# Altium PCB ESP32_DRIVER_BOARD.PcbDoc
Units mm, origin at the board's own origin, x right, y up, seen from the top; angles counter-clockwise.
Board outline 88.25 x 66.25 mm, 2 copper layers (Top Layer, Bottom Layer); 18 components, 41 nets, 173 pads, 36 vias.
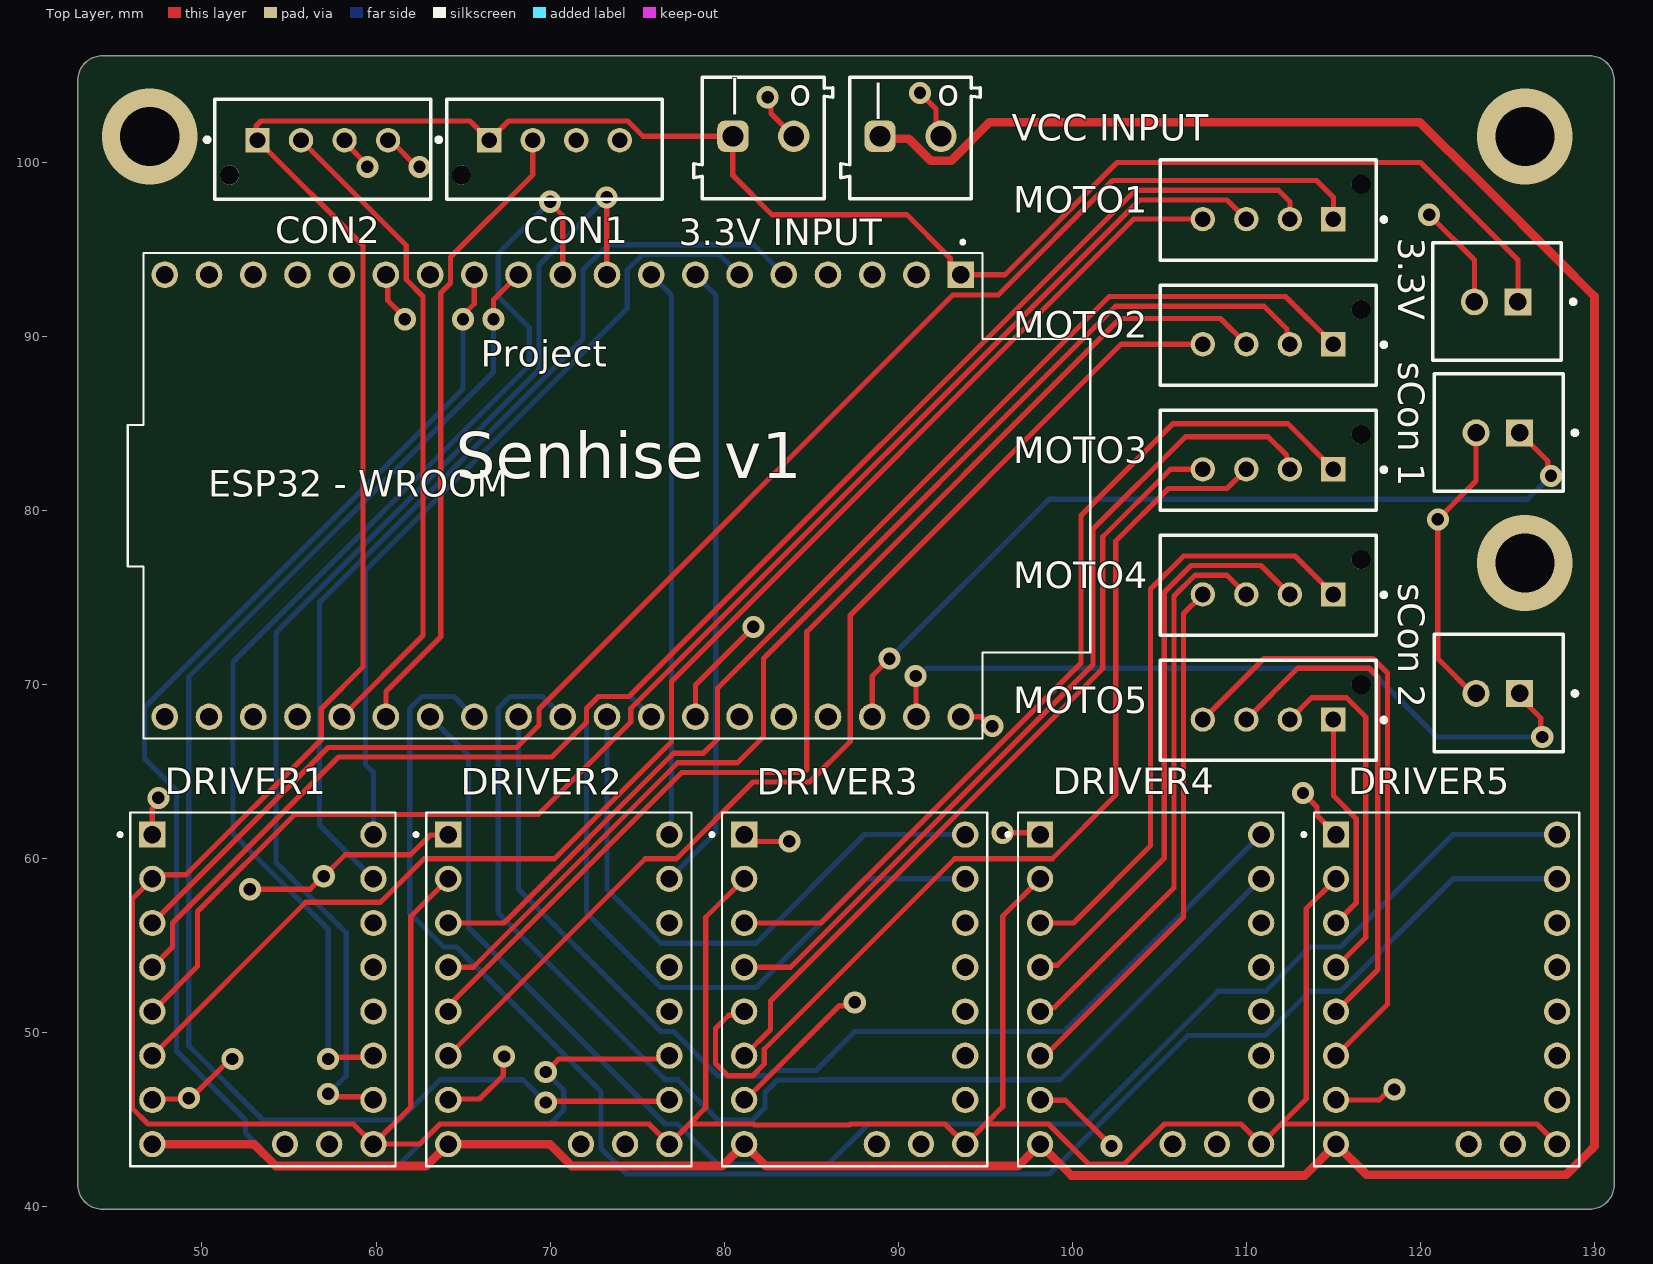
[diagram p0: Top Layer view]
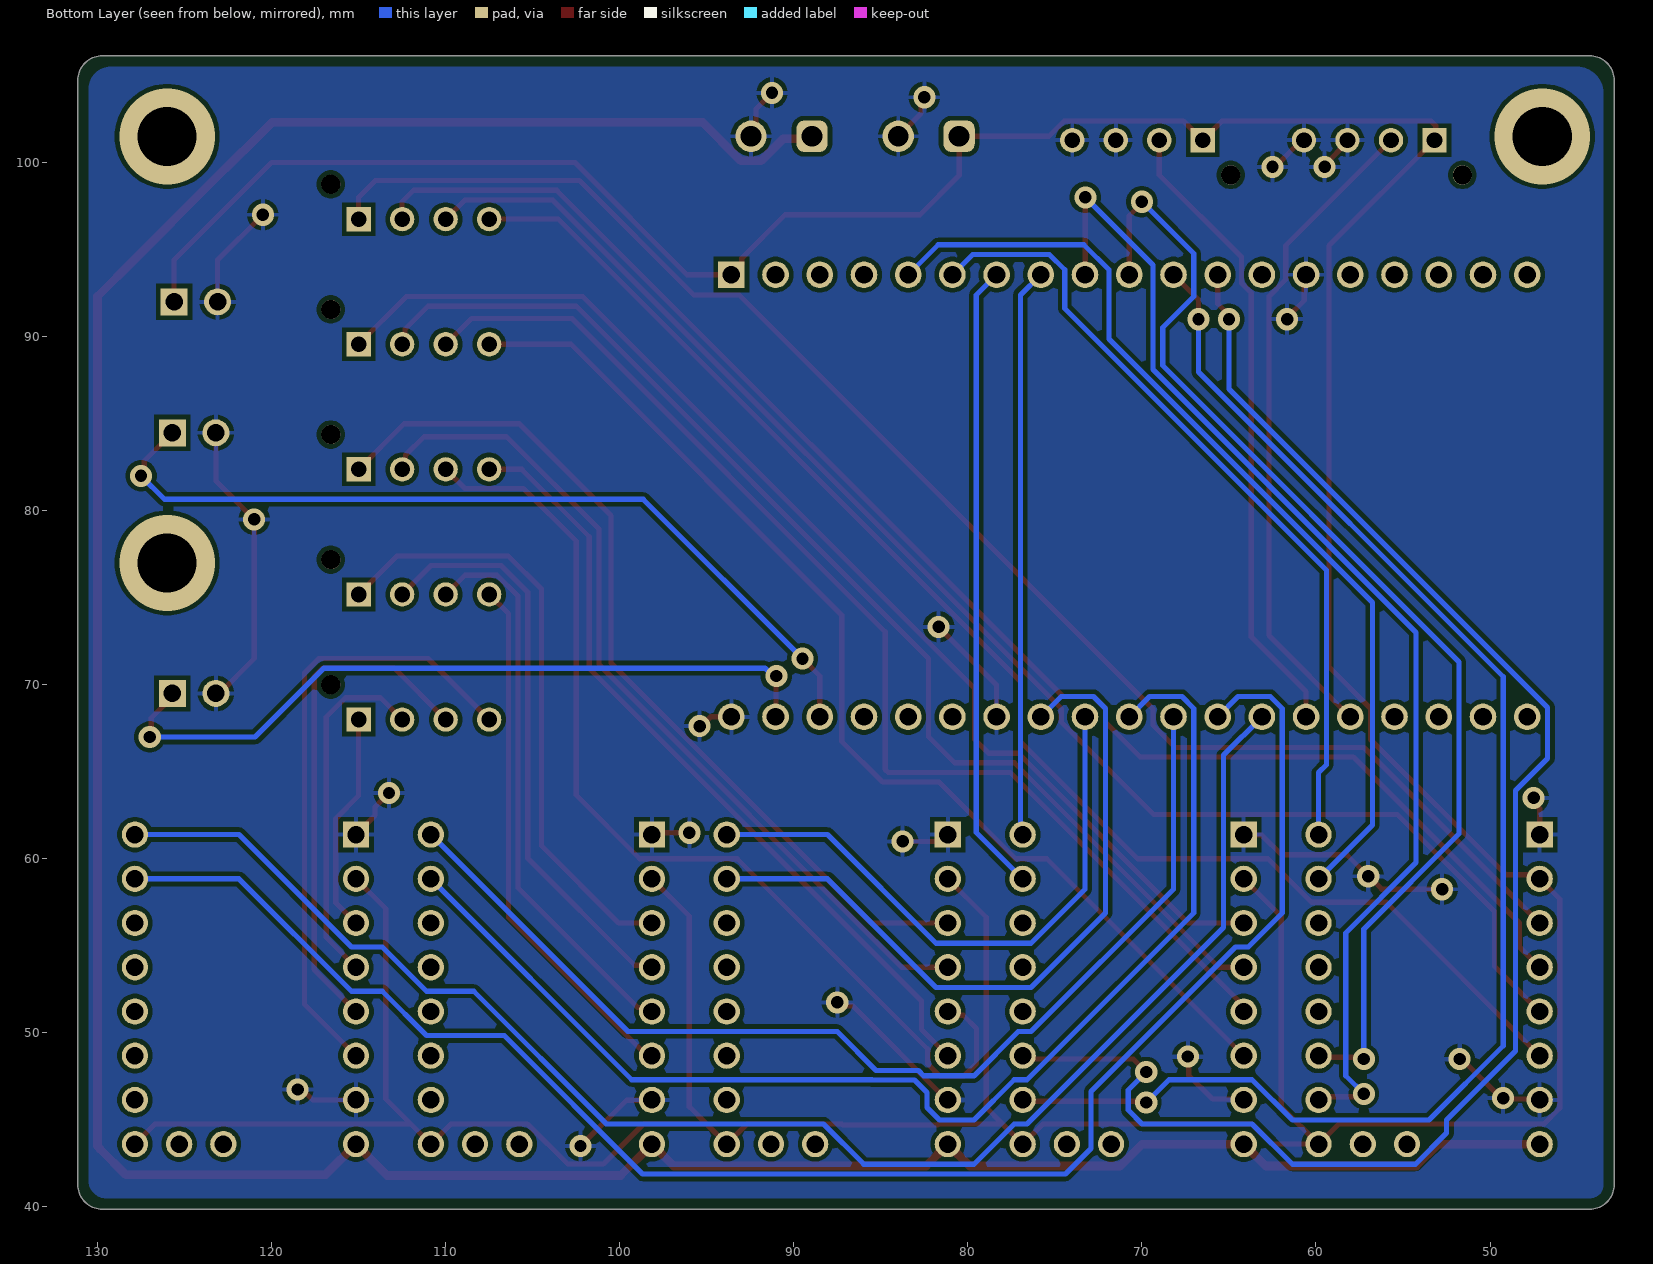
[diagram p1: Bottom Layer view, seen from below]

## Layer stack, top to bottom
Top Solder: solder mask 0.0102, Solder Resist, Dk 3.5
Top Layer: signal copper 0.0356
Dielectric 1: dielectric 0.32, FR-4, Dk 4.8
Bottom Layer: signal copper 0.0356
Bottom Solder: solder mask 0.0102, Solder Resist, Dk 3.5

## Board outline
42.873,41.27 42.873,104.73 cw(c44.27,104.73) 44.27,106.127 129.73,106.127 cw(c129.73,104.73) 131.127,104.73 131.127,41.27 cw(c129.73,41.27) 129.73,39.873 44.27,39.873 cw(c44.27,41.27)

## Design rules (kind name [scope] priority, off if disabled: settings)
Clearance [All] p1: gap=0.254 ignorepadtopadclearanceinfootprint=FALSE
PolygonConnect [All] p1: connectstyle=Relief reliefconductorwidth=0.254 reliefentries=4 polygonreliefangle="90 Angle" airgapwidth=0.254
RoutingVias [All] p1: holewidth=0.711 width=1.27 viastyle="Through Hole" minholewidth=0.711 minwidth=1.27 maxholewidth=0.711 maxwidth=1.27
SolderMaskExpansion [All] p1: expansion=0.102 istentingtop=FALSE
SupplyNets "Schematic Supply Nets_3" [InNet('+3.3V')] p1: voltage=0.000
SupplyNets "Schematic Supply Nets_1" [InNet('VCC')] p2: voltage=0.000
SupplyNets "Schematic Supply Nets" [InNet('GND')] p3: voltage=0.000
Width [All] p1: maxlimit=0.5 minlimit=0.254 preferedwidth=0.3
30 further rules are at their usual default settings.

## Components (designator, comment, footprint, x,y, rotation, side; value= is the part's Value field where it differs from the comment)
3.3V "B2B-XH-2(LF)(SN)" FP-B2B-XH-2_LF_SN-MFG 124.4,92.025 r0 top
"3.3V INPUT" "691103110002" 691103110002 1352.25,1371.41 r0 top
CON1 "B4B-XH-AM (LF)(SN)" FP-B4B-XH-AM_LF_SN-MFG 70.25,100.76 r180 top
CON2 "B4B-XH-AM (LF)(SN)" FP-B4B-XH-AM_LF_SN-MFG 56.942,100.76 r180 top
DRIVER1 "TMC2209_SILENTSTEPSTICK" MODULE_TMC2209_SILENTSTEPSTICK 53.5,52.5 r0 top
DRIVER2 "TMC2209_SILENTSTEPSTICK" MODULE_TMC2209_SILENTSTEPSTICK 70.5,52.5 r0 top
DRIVER3 "TMC2209_SILENTSTEPSTICK" MODULE_TMC2209_SILENTSTEPSTICK 87.5,52.5 r0 top
DRIVER4 "TMC2209_SILENTSTEPSTICK" MODULE_TMC2209_SILENTSTEPSTICK 104.5,52.5 r0 top
DRIVER5 "TMC2209_SILENTSTEPSTICK" MODULE_TMC2209_SILENTSTEPSTICK 121.5,52.5 r0 top
"ESP32 - WROOM" "DEVKIT_V1_ESP32-WROOM-32" MODULE_DEVKIT_V1_ESP32-WROOM-32 70.737,80.856 r270 top
MOTO1 "B4B-XH-AM (LF)(SN)" FP-B4B-XH-AM_LF_SN-MFG 111.25,97.275 r0 top
MOTO2 "B4B-XH-AM (LF)(SN)" FP-B4B-XH-AM_LF_SN-MFG 111.25,90.087 r0 top
MOTO3 "B4B-XH-AM (LF)(SN)" FP-B4B-XH-AM_LF_SN-MFG 111.25,82.9 r0 top
MOTO4 "B4B-XH-AM (LF)(SN)" FP-B4B-XH-AM_LF_SN-MFG 111.25,75.713 r0 top
MOTO5 "B4B-XH-AM (LF)(SN)" FP-B4B-XH-AM_LF_SN-MFG 111.25,68.525 r0 top
"sCon 1" "B2B-XH-2(LF)(SN)" FP-B2B-XH-2_LF_SN-MFG 124.5,84.5 r0 top
"sCon 2" "B2B-XH-2(LF)(SN)" FP-B2B-XH-2_LF_SN-MFG 124.5,69.525 r0 top
"VCC INPUT" "691103110002" 691103110002 1360.707,1371.41 r0 top (schematic designator VCC)

## Footprints (in the part's own frame and the unit in brackets; to place one, negate y for a bottom-side part, rotate by r counter-clockwise, add the part's x,y. Pads: shape width x height; smd on the part's side, far side on the other; paste and mask are expansions set on the pad)
691103110002 [mm] "3,50mm - modular - blue - Horizontal wire entry - Pressure clamp - 8,4mm height - 02p"
  rrect50% 1.8x1.8 hole 1.2: 1(-1271.75,-1269.9)
  round 1.8 hole 1.2: 2(-1268.25,-1269.9)
  silkscreen extent -1274,-1273.5 -1266,-1266.5, body extent -1274,-1273.5 -1266,-1266.5, height 8.45
FP-B2B-XH-2_LF_SN-MFG [mm]
  rect 1.55x1.55 hole 1 paste-2539.97 mask+0: 1(1.2,-0.025)
  round 1.55 hole 1 paste-2539.97 mask+0: 2(-1.3,-0.025)
  silkscreen extent -3.7,-3.37 4.5,3.37, body extent -3.8,-3.47 3.8,3.47, height 0.25
FP-B4B-XH-AM_LF_SN-MFG [mm]
  rect 1.4x1.4 hole 0.9 paste-2539.97 mask+0: 1(3.75,-0.525)
  round 1.4 hole 0.9 paste-2539.97 mask+0: 2(1.25,-0.525) 3(-1.25,-0.525) 4(-3.75,-0.525)
  round 1.1 hole 1.1 unplated paste-2539.97 mask+0: ""(5.35,1.475)
  silkscreen extent -6.2,-2.88 6.77,2.88, body extent -6.3,-2.98 6.3,2.98, height 0.25
MODULE_DEVKIT_V1_ESP32-WROOM-32 [mm]
  rect 1.53x1.53 / inner round 1.53 / far side rect 1.53x1.53 hole 1.02: 1(-12.7,22.85)
  round 1.53 hole 1.02: 2(-12.7,20.31) 3(-12.7,17.77) 4(-12.7,15.23) 5(-12.7,12.69) 6(-12.7,10.15) 7(-12.7,7.61) 8(-12.7,5.07) 9(-12.7,2.53) 10(-12.7,-0.01) 11(-12.7,-2.55) 12(-12.7,-5.09) 13(-12.7,-7.63) 14(-12.7,-10.17) 15(-12.7,-12.71) 16(-12.7,-15.25) 17(-12.7,-17.79) 18(-12.7,-20.33) 19(-12.7,-22.87) 20(12.7,-22.87) 21(12.7,-20.33) 22(12.7,-17.79) 23(12.7,-15.25) 24(12.7,-12.71) 25(12.7,-10.17) 26(12.7,-7.63) 27(12.7,-5.09) 28(12.7,-2.55) 29(12.7,-0.01) 30(12.7,2.53) 31(12.7,5.07) 32(12.7,7.61) 33(12.7,10.15) 34(12.7,12.69) 35(12.7,15.23) 36(12.7,17.77) 37(12.7,20.31) 38(12.7,22.85)
  silkscreen extent -14.67,-25 13.95,30.3
MODULE_TMC2209_SILENTSTEPSTICK [mm]
  rect 1.508x1.508 / inner round 1.508 / far side rect 1.508x1.508 hole 1: 1(-6.35,8.89)
  round 1.508 hole 1: 2(-6.35,6.35) 3(-6.35,3.81) 4(-6.35,1.27) 5(-6.35,-1.27) 6(-6.35,-3.81) 7(-6.35,-6.35) 8(-6.35,-8.89) 9(6.35,8.89) 10(6.35,6.35) 11(6.35,3.81) 12(6.35,1.27) 13(6.35,-1.27) 14(6.35,-3.81) 15(6.35,-6.35) 16(6.35,-8.89) 17(1.27,-8.89) 18(3.81,-8.89)
  silkscreen extent -8.3,-10.16 7.62,10.16

## Part data
3.3V "sCon 1" "sCon 2": library part CMP-17439-000499-1, "CONN HEADER VERT 2POS 2.5MM", Current Rating=3A, Flammability Rating="UL94 V-0", Insulation Color=Natural, Max Operating Temperature=85°C, Min Operating Temperature=-25°C, Voltage Rating=250V, Connector Type=Header, Contact Finish - Mating=TIN, Contact Material=Brass, Contact Shape=Square, Contact Type="Male Pin", Fastening Type=Detent, Height=7mm, Housing Material=Nylon, Insulation Material=Nylon, Length=7.4mm, Mount="Through Hole", Number of Poles=2, Number of Positions=2, Number of Rows=1, Packaging=Bulk, Pitch=2.5mm, Series=XH, Shape=Straight, Termination=Press-Fit, Width=5.75mm
"3.3V INPUT" "VCC INPUT": library part CMP-1502-03254-2, Color=Blue, Current=10A, Max Operating Temperature=105°C, Min Operating Temperature=-40°C, Voltage=125V, Contact Material="Brass, Copper, Nickel, Tin, Zinc", Contact Plating=Tin, Current Rating=10A, Height=8.5mm, Housing Material=Nylon, Lead Pitch=3.5mm, Length=7mm, Mount="Through Hole", NexarPartId=18818286, Number of Contacts=2, Number of Levels=1, Number of Pins=2, Number of Positions Per Level=2, Number of Rows=1, Packaging=Box, Pitch=3.5052mm, Plating=Steel, REACH SVHC=Unknown, RoHS=Compliant, Stripping Length=-6mm, Termination=Screw, Voltage Rating=125V, Width=8mm, Wire Gauge (Max)=26AWG, Wire Gauge (Min)=16AWG, Wire/Cable Gauge=26AWG
CON1 CON2 MOTO1 MOTO2 MOTO3 MOTO4 MOTO5: library part CMP-17439-000117-1, "CONN HEADER VERT 4POS 2.5MM", Color=Green, Contact Resistance=20mR, Flammability Rating="UL94 V-0", Housing Color=White, Insulation Color=Natural, Max Current Rating=3A, Max Operating Temperature=85°C, Max Voltage Rating (AC)=250V, Min Operating Temperature=-25°C, Connector Type=Header, Contact Finish - Mating=TIN, Contact Material=Brass, Contact Plating=Copper, Contact Shape=Square, Contact Type="Male Pin", Depth=5.75mm, Fastening Type=Detent, Gender=Male, Housing Material=Polyamide, Insulation Material=Nylon, Lead Free="Lead Free", Length=12.4mm, Mated Stacking Heights=9.8mm, Mount="Through Hole", Number of Pins=4, Number of Positions=4, Number of Rows=1, Orientation=Straight, Packaging=Bulk, Pitch=2.5mm, Series=XH, Termination=Solder, Voltage Rating=250V
DRIVER1 DRIVER2 DRIVER3 DRIVER4 DRIVER5: "TMC2209 Motor Controller/Driver Power Management Evaluation Board", Package=None, Availability="In Stock", Check_prices=https://www.snapeda.com/parts/TMC2209%20SILENTSTEPSTICK/Trinamic+Motion+Control+GmbH/view-part/?ref=eda, MF="Trinamic Motion Control GmbH", MP="TMC2209 SILENTSTEPSTICK", Price=None, Purchase-URL="https://pricing.snapeda.com/search/part/TMC2209 SILENTSTEPSTICK/?ref=eda", SnapEDA_Link=https://www.snapeda.com/parts/TMC2209%20SILENTSTEPSTICK/Trinamic+Motion+Control+GmbH/view-part/?ref=snap
"ESP32 - WROOM": "WROOM-32 Development Board ESP32 ESP-32S WiFi Bluetooth Dev Module", Package=Package, Check_prices=https://www.snapeda.com/parts/DEVKIT%20V1%20ESP32-WROOM-32/Espressif+Systems/view-part/?ref=eda, MF="Espressif Systems", MP="DEVKIT V1 ESP32-WROOM-32", SnapEDA_Link=https://www.snapeda.com/parts/DEVKIT%20V1%20ESP32-WROOM-32/Espressif+Systems/view-part/?ref=snap

## Via types
v1: diameter 1.27, hole 0.711, Top Layer to Bottom Layer, 33 vias
v2: diameter 5.5, hole 3.4, Top Layer to Bottom Layer, 3 vias

## Nets (pads, with @x,y where several pads share a name; then routed paths per layer and width w, separated by ;. In a path a pad name is that pad's centre, name@x,y a point inside that pad or via, vN(x,y) a via of type N, cw(c..) or ccw(c..) an arc to the next point about the centre after c; other vN are vias at no path point)
+3.3V: 3.3V.1 "3.3V INPUT.1" "ESP32 - WROOM.1" CON1.1 CON2.1 DRIVER1.2 DRIVER1.16 DRIVER2.2 DRIVER2.16 DRIVER3.2 DRIVER3.16 DRIVER4.2 DRIVER4.16 DRIVER5.2 DRIVER5.16 | length 303.4
  Top Layer w0.3: DRIVER2.2 62,56.7 62,45.76 DRIVER1.16 ; DRIVER3.2 78.946,56.646 78.946,45.706 78.008,44.768 ; DRIVER4.2 96,56.7 96,45.76 95.008,44.768 ; DRIVER5.2 113.438,57.138 113.438,46.198 112.008,44.768 ; 3.3V.1 125.6,94.4 120,100 102.573,100 96.129,93.556 93.587,93.556 93.587,93.913 93.241,93.913 92.983,94.171 92.983,94.517 90.5,97 82.75,97 80.5,99.25 80.5,101.51 75.336,101.51 74.457,102.389 67.604,102.389 CON1.1 65.396,102.389 53.389,102.389 53.124,102.124 53.124,101.352 CON2.1 59.25,95.226 59.25,71.031 56.858,68.64 56.858,66.858 49.081,59.081 47.381,59.081 DRIVER1.2 45.992,57.692 45.992,45.67 46.894,44.768 58.692,44.768 DRIVER1.16 ; DRIVER5.16 126.692,44.768 112.008,44.768 ; DRIVER1.16 62.512,43.61 63.67,44.768 75.692,44.768 DRIVER2.16 78.008,44.768 ; 78.008,44.768 81.691,44.768 81.748,44.711 87.191,44.711 87.248,44.768 92.692,44.768 DRIVER3.16 95.008,44.768 ; 95.008,44.768 98.63,44.768 100.937,42.461 102.983,42.461 105.29,44.768 109.692,44.768 DRIVER4.16 112.008,44.768
GND: 3.3V.2 "3.3V INPUT.2" "ESP32 - WROOM.14" "ESP32 - WROOM.32" "ESP32 - WROOM.38" "sCon 1.2" "sCon 2.2" "VCC INPUT.2" CON1.3 CON1.4 CON2.3 CON2.4 DRIVER1.1 DRIVER1.7 DRIVER2.1 DRIVER2.7 DRIVER3.1 DRIVER3.7 DRIVER4.1 DRIVER4.7 DRIVER5.1 DRIVER5.7 | length 95.7
  Top Layer w0.3: DRIVER1.7 47.2,46.2 49.2,46.2 v1(49.25,46.25) 49.375,46.25 51.625,48.5 v1(51.75,48.5) ; DRIVER1.1 47.15,62.888 47.5,63.238 v1(47.5,63.5) ; v1(52.75,58.25) 56.216,58.25 56.966,59 v1(57,59) 58.232,60.232 61.982,60.232 63.122,61.372 64.132,61.372 DRIVER2.1 ; CON2.3 58.192,101.172 59.5,99.863 v1(59.5,99.75) ; 60.567,93.556 60.672,93.451 60.672,92.078 61.657,91.093 v1(61.657,91) ; CON2.4 60.828,101.285 62.363,99.75 v1(62.5,99.75) ; DRIVER2.7 64.2,46.2 65.95,46.2 67.305,47.555 67.305,48.586 v1(67.36,48.64) ; 78.347,68.156 78.347,69.994 v1(81.677,73.323) ; DRIVER3.7 81.214,46.15 86.629,51.564 87.314,51.564 v1(87.5,51.75) ; DRIVER3.1 81.54,61 v1(83.75,61) ; v1(82.5,103.75) 82.686,103.564 82.686,102.824 84,101.51 ; v1(91.25,104) 92.17,103.08 92.17,101.797 92.457,101.51 ; 93.587,68.156 94.783,68.156 95.318,67.62 v1(95.406,67.62) ; v1(96,61.5) 98.04,61.5 DRIVER4.1 ; DRIVER4.7 98.166,46.134 99.616,46.134 v1(102.25,43.5) ; v1(113.252,63.781) 114.058,62.976 114.058,62.482 DRIVER5.1 ; DRIVER5.7 117.638,46.15 118.238,46.75 v1(118.5,46.75) ; v1(120.5,97) 123.1,94.4 3.3V.2 ; 123,69.5 121,71.5 v1(121,79.5) 123.2,81.7 123.2,84.475
NetCON1_2: "ESP32 - WROOM.25" CON1.2 | length 36.6
  Top Layer w0.3: 60.567,68.156 60.567,69.604 63.713,72.75 63.713,92.508 64.276,93.071 64.276,94.566 69,99.29 CON1.2
NetCON2_2: "ESP32 - WROOM.24" CON2.2 | length 38
  Top Layer w0.3: CON2.2 61.736,95.24 61.736,93.273 62.696,92.314 62.696,72.824 58.027,68.156
NetDRIVER1_3: DRIVER1.3 MOTO1.1 | length 87.7
  Top Layer w0.3: DRIVER1.3 57.237,66.397 68.082,66.397 69.356,67.671 69.356,68.606 93.137,92.387 95.744,92.387 102.319,98.962 114.038,98.962 115,98 MOTO1.1
NetDRIVER1_4: DRIVER1.4 MOTO1.2 | length 86.4
  Top Layer w0.3: DRIVER1.4 48.308,54.928 48.308,56.311 57.84,65.843 70.093,65.843 72.098,67.848 72.098,68.64 72.783,69.325 74.54,69.325 103.623,98.408 111.842,98.408 112.5,97.75 MOTO1.2
NetDRIVER1_5: DRIVER1.5 MOTO1.3 | length 84.9
  Top Layer w0.3: DRIVER1.5 49.75,53.83 49.75,56.969 55.329,62.548 69.321,62.548 74.638,67.865 74.638,68.64 103.853,97.854 108.896,97.854 MOTO1.3
NetDRIVER1_6: DRIVER1.6 MOTO1.4 | length 82.3
  Top Layer w0.3: DRIVER1.6 55.96,57.5 60.25,57.5 62.75,60 63.662,60 63.67,60.008 64.63,60.008 64.638,60 70.25,60 76.976,66.726 76.976,70.194 103.532,96.75 MOTO1.4
NetDRIVER1_9: "ESP32 - WROOM.6" DRIVER1.9 | length 46.2
  Bottom Layer w0.3: DRIVER1.9 59.85,64.953 59.398,65.404 59.398,76.581 74.436,91.619 74.436,93.838 75.323,94.725 79.718,94.725 80.887,93.556
NetDRIVER1_10: "ESP32 - WROOM.5" DRIVER1.10 | length 55.4
  Bottom Layer w0.3: DRIVER1.10 56.75,61.95 56.75,74.717 71.896,89.863 71.896,93.838 73.337,95.279 81.704,95.279 83.427,93.556
NetDRIVER1_14: "ESP32 - WROOM.10" DRIVER1.14 | length 67.7
  Top Layer w0.3: v1(57.25,48.5) 57.345,48.595 59.755,48.595 DRIVER1.14 ; v1(70,97.75) 70,97.67 70.727,96.943 70.727,93.556
  Bottom Layer w0.3: v1(57.25,48.5) 57.25,55.965 51.778,61.437 51.778,71.312 68.802,88.336 68.802,90.529 67.018,92.313 67.018,94.768 v1(70,97.75)
NetDRIVER1_15: "ESP32 - WROOM.9" DRIVER1.15 | length 68.7
  Top Layer w0.3: v1(57.25,46.5) 57.425,46.325 59.675,46.325 DRIVER1.15 ; v1(73.25,98) 73.259,97.991 73.259,93.564 73.267,93.556
  Bottom Layer w0.3: v1(57.25,46.5) 58.289,47.539 58.289,55.742 54.25,59.781 54.25,73 69.356,88.106 69.356,94.106 v1(73.25,98)
NetDRIVER2_3: DRIVER2.3 MOTO2.1 | length 68.6
  Top Layer w0.3: DRIVER2.3 67.343,56.31 77.104,66.071 78.821,66.071 79.617,66.867 79.617,69.795 102.127,92.304 112.259,92.304 MOTO2.1
NetDRIVER2_4: DRIVER2.4 MOTO2.2 | length 68
  Top Layer w0.3: DRIVER2.4 65.587,53.77 77.334,65.517 80.767,65.517 82.258,67.008 82.258,71.508 102.5,91.75 111,91.75 112.331,90.419 112.331,89.732 MOTO2.2
NetDRIVER2_5: DRIVER2.5 MOTO2.3 | length 67.8
  Top Layer w0.3: DRIVER2.5 64.15,51.55 77.563,64.963 84.574,64.963 84.75,65.139 84.75,73.044 102.75,91.044 108.519,91.044 MOTO2.3
NetDRIVER2_6: DRIVER2.6 MOTO2.4 | length 64.5
  Top Layer w0.3: DRIVER2.6 75.468,60.008 77.258,60.008 81.659,64.409 84.909,64.409 87.25,66.75 87.25,74.01 102.802,89.562 MOTO2.4
NetDRIVER2_9: "ESP32 - WROOM.8" DRIVER2.9 | length 32.7
  Bottom Layer w0.3: 75.807,93.556 76.976,92.387 76.976,61.516 DRIVER2.9
NetDRIVER2_10: "ESP32 - WROOM.7" DRIVER2.10 | length 36.3
  Bottom Layer w0.3: DRIVER2.10 79.516,61.516 79.516,84.669 79.516,92.387 78.347,93.556
NetDRIVER2_14: "ESP32 - WROOM.12" DRIVER2.14 | length 90
  Top Layer w0.3: v1(65,91) 65,91.24 65.647,91.887 65.647,93.556 ; v1(69.75,47.75) 70.5,48.5 76.66,48.5 DRIVER2.14
  Bottom Layer w0.3: v1(65,91) 65,87 46.698,68.698 46.698,65.771 48.539,63.93 48.539,48.961 52.5,45 52.5,44.242 54.29,42.452 61.354,42.452 63.67,44.768 69.987,44.768 70.789,45.57 70.789,46.711 v1(69.75,47.75)
NetDRIVER2_15: "ESP32 - WROOM.11" DRIVER2.15 | length 83.1
  Top Layer w0.3: v1(66.75,91) 66.75,92.118 68.187,93.556 ; v1(69.75,46) 69.825,46.075 76.775,46.075 DRIVER2.15
  Bottom Layer w0.3: v1(66.75,91) 66.75,87.967 49.238,70.455 49.238,49.262 53.508,44.992 61.354,44.992 63.67,47.308 68.442,47.308 v1(69.75,46)
NetDRIVER3_3: DRIVER3.3 MOTO3.1 | length 51.8
  Top Layer w0.3: DRIVER3.3 85.565,56.31 100.5,71.245 100.5,79.717 105.783,85 112.375,85 MOTO3.1
NetDRIVER3_4: DRIVER3.4 MOTO3.2 | length 49.7
  Top Layer w0.3: DRIVER3.4 83.809,53.77 101.196,71.157 101.196,78.946 106.5,84.25 111.25,84.25 112.299,83.201 112.299,82.576 MOTO3.2
NetDRIVER3_5: DRIVER3.5 MOTO3.3 | length 58.3
  Top Layer w0.3: DRIVER3.5 80.934,51.014 80.264,51.014 79.5,50.25 79.5,48.25 80.218,47.532 81.63,47.532 82.308,48.21 82.308,49.058 93.25,60 93.362,60 93.37,60.008 98.847,60.008 102.5,63.661 102.5,78.25 105.521,81.271 108.896,81.271 MOTO3.3
NetDRIVER3_6: DRIVER3.6 MOTO3.4 | length 45.7
  Top Layer w0.3: DRIVER3.6 82.661,50.201 82.661,51.839 101.75,70.928 101.75,78.5 105.625,82.375 MOTO3.4
NetDRIVER3_9: "ESP32 - WROOM.30" DRIVER3.9 | length 34.4
  Bottom Layer w0.3: 73.267,68.156 73.267,58.255 76.37,55.152 81.828,55.152 88.066,61.39 DRIVER3.9
NetDRIVER3_10: "ESP32 - WROOM.31" DRIVER3.10 | length 42.3
  Bottom Layer w0.3: 75.807,68.156 74.638,69.325 72.783,69.325 72.098,68.64 72.098,56.884 76.37,52.612 81.828,52.612 88.066,58.85 DRIVER3.10
NetDRIVER4_3: DRIVER4.3 MOTO4.1 | length 35.1
  Top Layer w0.3: DRIVER4.3 100.06,56.31 104.5,60.75 104.5,75.5 106.399,77.399 112.788,77.399 MOTO4.1
NetDRIVER4_4: DRIVER4.4 MOTO4.2 | length 33.5
  Top Layer w0.3: DRIVER4.4 98.266,53.886 99.136,53.886 105.288,60.038 105.288,75.32 106.813,76.846 110.842,76.846 MOTO4.2
NetDRIVER4_5: DRIVER4.5 MOTO4.3 | length 32.5
  Top Layer w0.3: DRIVER4.5 98.381,51.461 98.961,51.461 105.842,58.342 105.842,75.091 107.043,76.292 108.896,76.292 MOTO4.3
NetDRIVER4_6: DRIVER4.6 MOTO4.4 | length 30.5
  Top Layer w0.3: DRIVER4.6 98.44,48.69 106.396,56.646 106.396,74.083 MOTO4.4
NetDRIVER4_9: "ESP32 - WROOM.28" DRIVER4.9 | length 62.7
  Bottom Layer w0.3: 68.187,68.156 68.187,58.255 76.37,50.072 77.106,50.072 79.646,47.532 82.529,47.532 82.84,47.843 85.271,47.843 87.5,50.072 99.532,50.072 DRIVER4.9
NetDRIVER4_10: "ESP32 - WROOM.29" DRIVER4.10 | length 71.2
  Bottom Layer w0.3: 70.727,68.156 69.558,69.325 67.703,69.325 67.018,68.64 67.018,56.884 76.594,47.308 77.33,47.308 79.646,44.992 81.63,44.992 82.35,45.712 82.35,46.569 83.07,47.289 85.5,47.289 85.519,47.308 99.308,47.308 DRIVER4.10
NetDRIVER5_3: DRIVER5.3 MOTO5.1 | length 12.7
  Top Layer w0.3: MOTO5.1 115,63.619 116.308,62.311 116.308,57.468 DRIVER5.3
NetDRIVER5_4: DRIVER5.4 MOTO5.2 | length 20.4
  Top Layer w0.3: MOTO5.2 113.75,69.25 115.75,69.25 116.862,68.138 116.862,55.482 DRIVER5.4
NetDRIVER5_5: DRIVER5.5 MOTO5.3 | length 29.2
  Top Layer w0.3: MOTO5.3 112.954,70.954 117.046,70.954 117.554,70.446 117.554,53.634 DRIVER5.5
NetDRIVER5_6: DRIVER5.6 MOTO5.4 | length 35.6
  Top Layer w0.3: MOTO5.4 111.008,71.508 117.275,71.508 118.108,70.675 118.108,51.648 DRIVER5.6
NetDRIVER5_9: "ESP32 - WROOM.26" DRIVER5.9 | length 89
  Bottom Layer w0.3: 63.107,68.156 65.308,65.955 65.308,56.054 76.594,44.768 77.33,44.768 79.646,42.452 85.974,42.452 88.29,44.768 100.768,44.768 108.388,52.388 111.106,52.388 113.646,54.928 115.406,54.928 121.868,61.39 DRIVER5.9
NetDRIVER5_10: "ESP32 - WROOM.27" DRIVER5.10 | length 97.3
  Bottom Layer w0.3: 65.647,68.156 64.478,69.325 62.623,69.325 61.938,68.64 61.938,56.884 63.894,54.928 64.63,54.928 72.928,46.63 72.928,43.354 74.384,41.898 98.681,41.898 106.631,49.848 111.106,49.848 113.646,52.388 115.406,52.388 121.868,58.85 DRIVER5.10
"NetESP32 - WROOM_36": "ESP32 - WROOM.36" "sCon 1.1" | length 49.3
  Top Layer w0.3: 88.507,68.156 88.507,70.507 v1(89.5,71.5) ; 125.7,84.475 127.314,82.861 127.314,82.186 v1(127.5,82)
  Bottom Layer w0.3: v1(89.5,71.5) 98.654,80.654 126.154,80.654 v1(127.5,82)
"NetESP32 - WROOM_37": "ESP32 - WROOM.37" "sCon 2.1" | length 43.3
  Top Layer w0.3: v1(91,70.5) 91.024,70.476 91.024,68.179 91.047,68.156 ; 125.5,69.5 126.915,68.085 126.915,67.085 v1(127,67)
  Bottom Layer w0.3: v1(91,70.5) 91.207,70.5 91.661,70.954 116.995,70.954 120.949,67 v1(127,67)
VCC: "VCC INPUT.1" DRIVER1.8 DRIVER2.8 DRIVER3.8 DRIVER4.8 DRIVER5.8 | length 184.4
  Top Layer w0.5: DRIVER1.8 52.991,43.61 54.249,42.352 62.892,42.352 DRIVER2.8 69.991,43.61 71.249,42.352 79.892,42.352 DRIVER3.8 82.408,42.352 96.892,42.352 DRIVER4.8 99.953,41.807 113.347,41.807 DRIVER5.8 116.908,41.852 128.371,41.852 129.854,43.334 130,43.481 130.004,76.995 ccw(c126.5,77) 130.004,77.001 130,92.309 127.804,94.505 123.704,98.604 121.655,100.654 121.621,100.654 121.316,100.959 119.959,102.316 95.249,102.316 93.039,100.106 91.876,100.106 90.607,101.374 89.093,101.374 88.957,101.51
pads on no net: "ESP32 - WROOM.2" "ESP32 - WROOM.3" "ESP32 - WROOM.4" "ESP32 - WROOM.13" "ESP32 - WROOM.15" "ESP32 - WROOM.16" "ESP32 - WROOM.17" "ESP32 - WROOM.18" "ESP32 - WROOM.19" "ESP32 - WROOM.20" "ESP32 - WROOM.21" "ESP32 - WROOM.22" "ESP32 - WROOM.23" "ESP32 - WROOM.33" "ESP32 - WROOM.34" "ESP32 - WROOM.35" CON1. CON2. DRIVER1.11 DRIVER1.12 DRIVER1.13 DRIVER1.17 DRIVER1.18 DRIVER2.11 DRIVER2.12 DRIVER2.13 DRIVER2.17 DRIVER2.18 DRIVER3.11 DRIVER3.12 DRIVER3.13 DRIVER3.14 DRIVER3.15 DRIVER3.17 DRIVER3.18 DRIVER4.11 DRIVER4.12 DRIVER4.13 DRIVER4.14 DRIVER4.15 DRIVER4.17 DRIVER4.18 DRIVER5.11 DRIVER5.12 DRIVER5.13 DRIVER5.14 DRIVER5.15 DRIVER5.17 DRIVER5.18 MOTO1. MOTO2. MOTO3. MOTO4. MOTO5.
copper on no net:
  other v2: 126,77 47,101.5 126,101.5

## Polygon pours and split planes (outlines as drawn)
GND on Bottom Layer "GND_Layer" (solid, pour order 0): 43.5,104 cw(c45,104) 45,105.5 129.25,105.5 cw(c129.25,104.25) 130.5,104.25 130.5,41.5 cw(c129.5,41.5) 129.5,40.5 44.25,40.5 cw(c44.25,41.25) 43.5,41.25 43.5,42

## Silkscreen, mask and mechanical layers (free items; w line width, h text height)
Top Overlay:
  text "|" at 80.254,103.254 h1.52
  text "o" at 83.754,103.254 h1.52
  text "o" at 92.254,103.254 h1.52
  text "|" at 88.5,103 h1.52
  text "Project" at 66.004,88.262 h1.52
  text "Senhise v1" at 64.567,80.998 h4.52
Mechanical 1:
  lines w0.254: 104,40 129.73,40 ccw(c129.73,41.27) 131,41.27 131,104.73 ccw(c129.73,104.73) 129.73,106 44.27,106 ccw(c44.27,104.73) 43,104.73 43,41.27 ccw(c44.27,41.27) 44.27,40 106,40